# Altium PCB PCB_Arduino_Mega_2560_new.PcbDoc
Units mm, origin at the board's own origin, x right, y up, seen from the top; angles counter-clockwise.
Board outline 101.7 x 53.44 mm, 2 copper layers (Top Layer, Bottom Layer); 68 components, 110 nets, 365 pads, 90 vias.
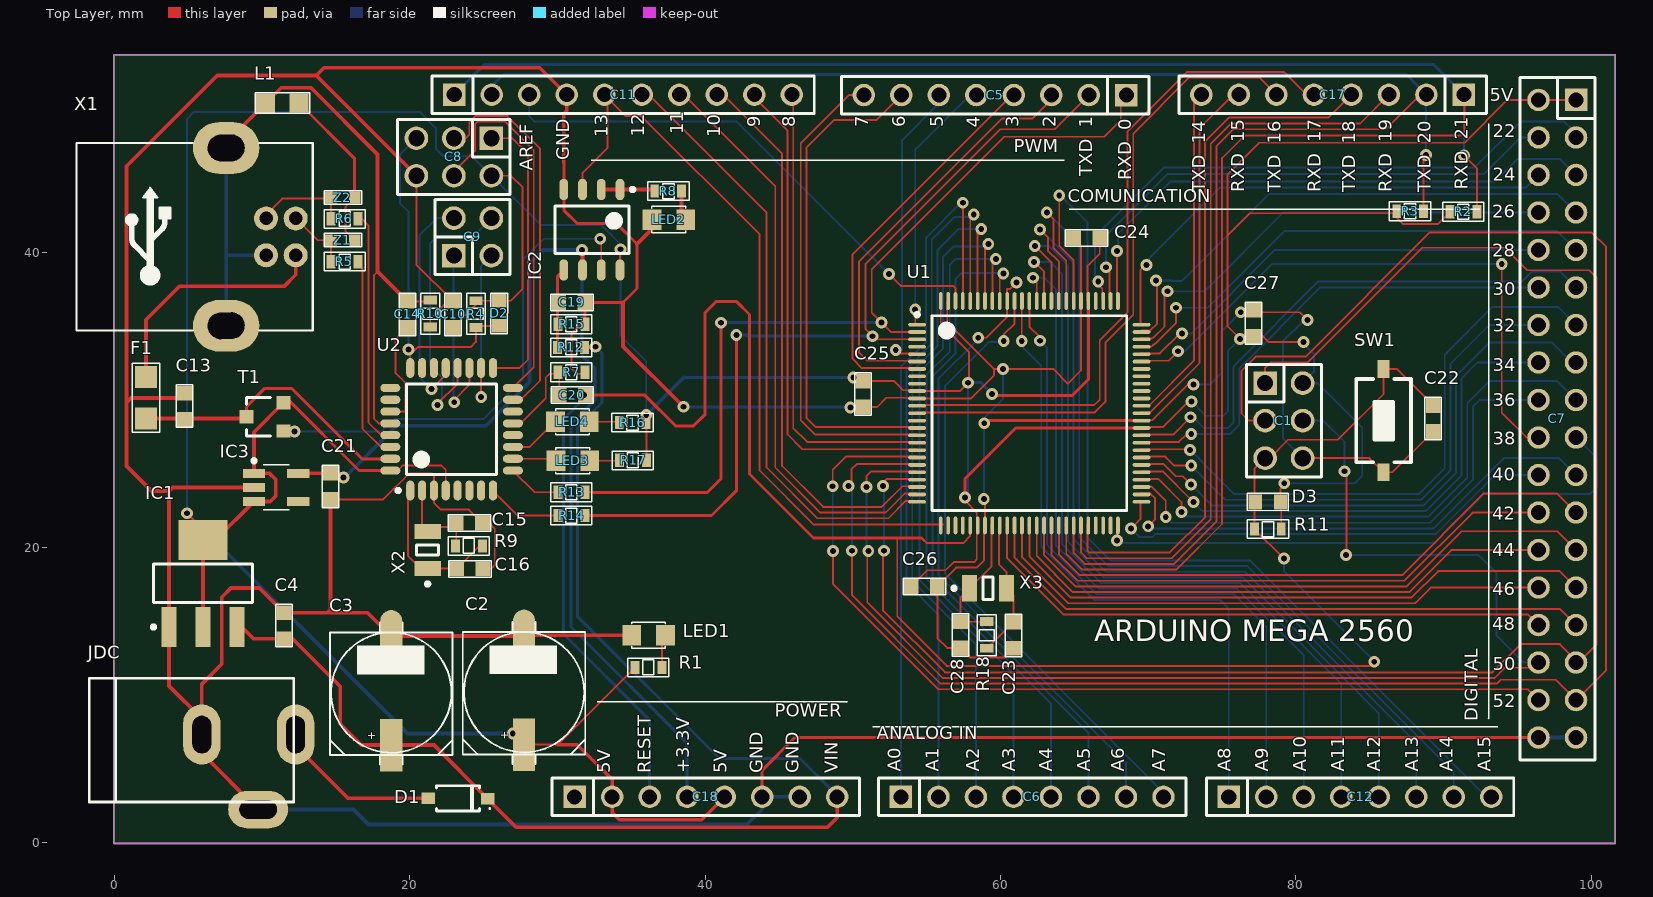
[diagram p0: Top Layer view]
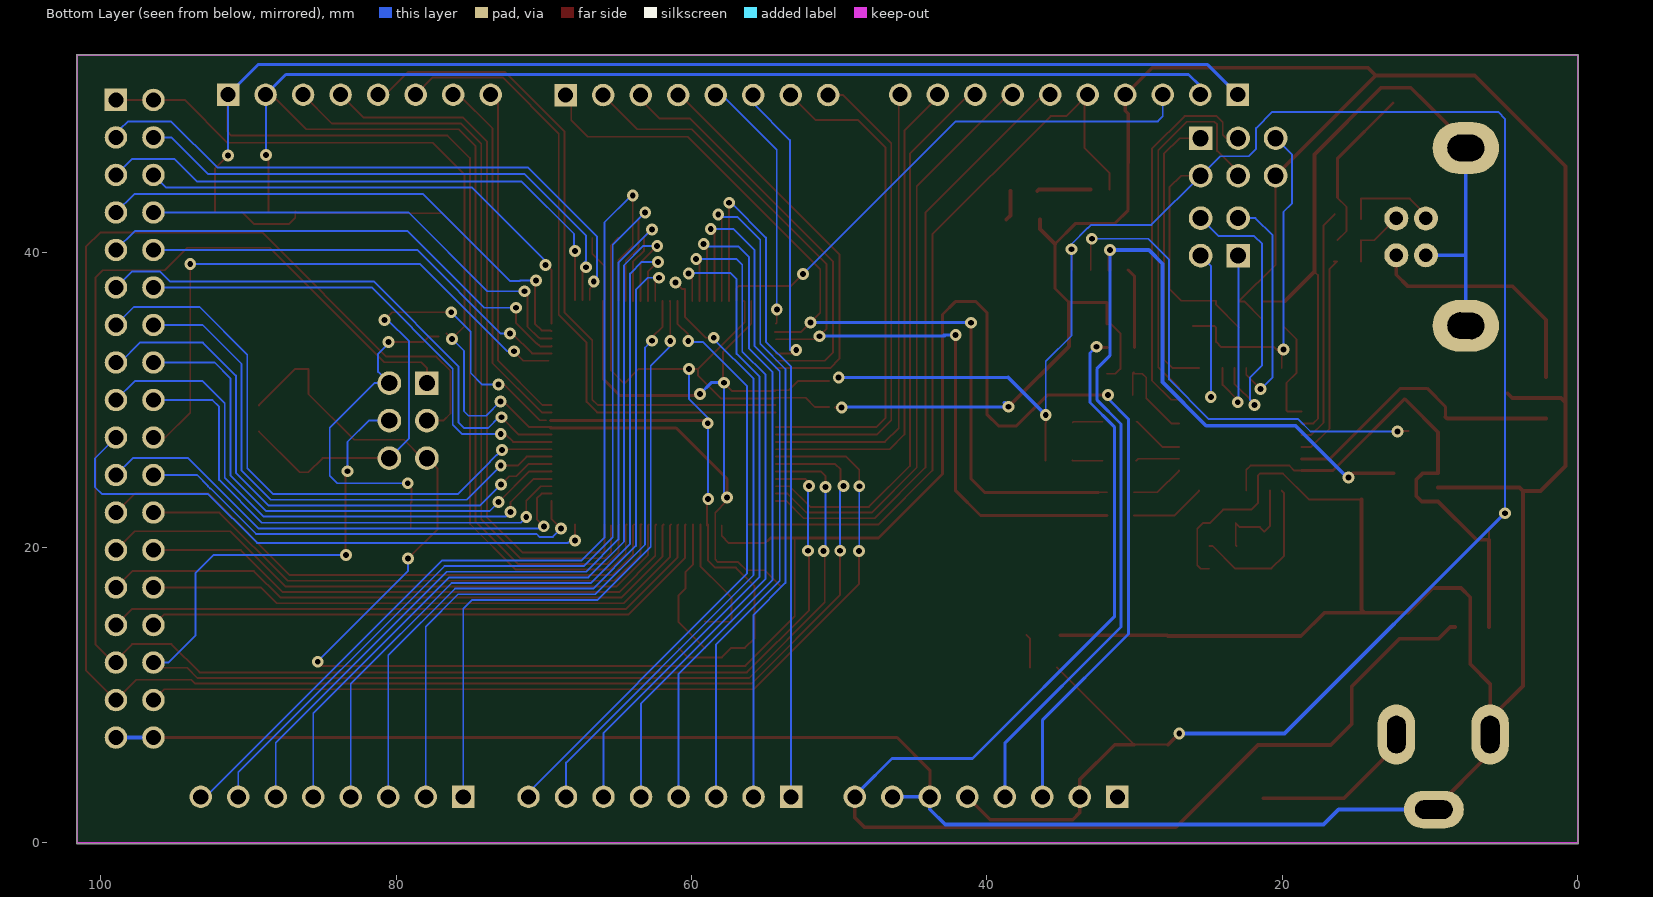
[diagram p1: Bottom Layer view, seen from below]
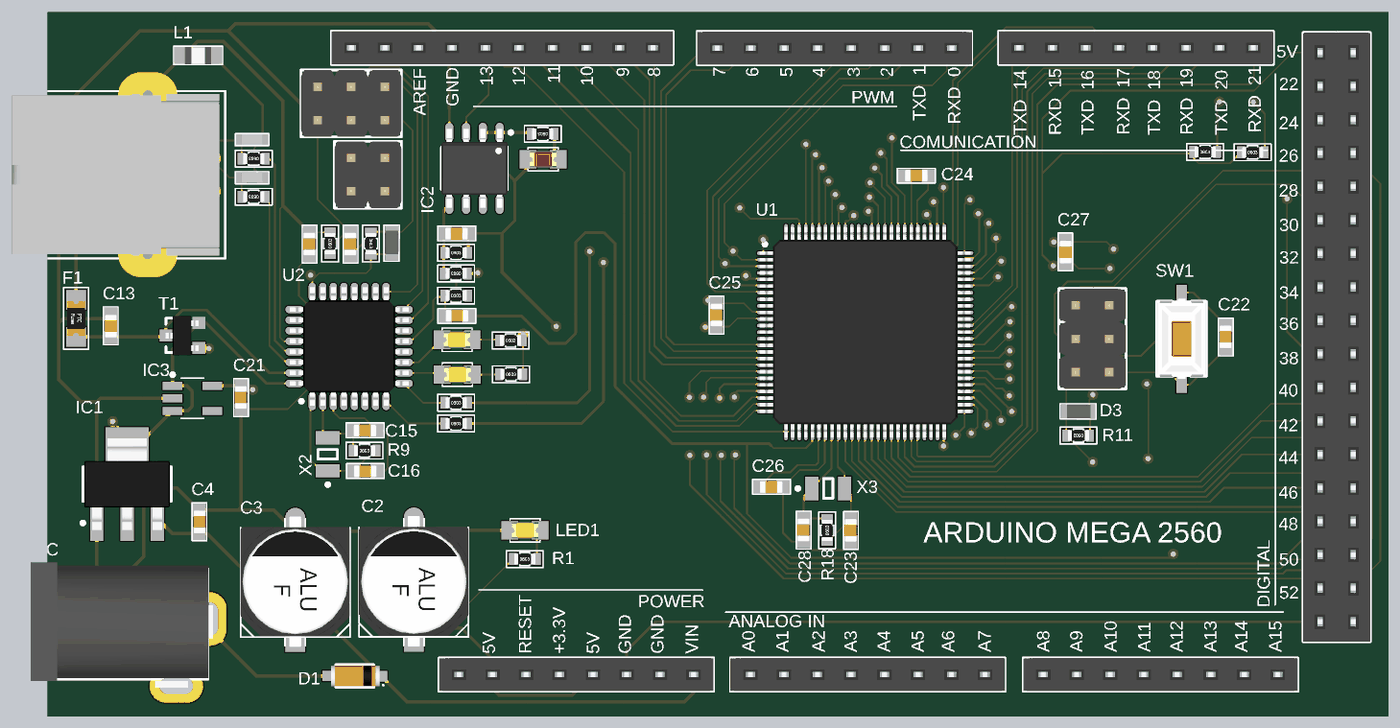
[diagram p2: 3D render of the assembled board from above, using the file's embedded part models]

## Layer stack, top to bottom
Top Solder: solder mask 0.0102, Solder Resist, Dk 3.5
Top Layer: signal copper 0.0356
Dielectric 1: dielectric 0.32, FR-4, Dk 4.8
Bottom Layer: signal copper 0.0356
Bottom Solder: solder mask 0.0102, Solder Resist, Dk 3.5

## Board outline
0,-0.05 cw(c0,0) -0.05,0 -0.05,53.34 cw(c0,53.34) 0,53.39 101.6,53.39 cw(c101.6,53.34) 101.65,53.34 101.65,0 cw(c101.6,0) 101.6,-0.05

## Design rules (kind name [scope] priority, off if disabled: settings)
Clearance [All] p1: gap=0.254 ignorepadtopadclearanceinfootprint=FALSE except(0: Arc-Hole Track-Hole SMDPad-Hole THPad-Hole Via-Hole Fill-Hole Poly-Hole Region-Hole Text-Hole)
PolygonConnect [All] p1: connectstyle=Relief reliefconductorwidth=0.254 reliefentries=4 polygonreliefangle="90 Angle" airgapwidth=0.254
RoomDefinition Sheet_Arduino_Mega_2560 [InComponentClass('Sheet_Arduino_Mega_2560')] p1: confinementstyle=ConfineIn formatcopy=TRUE lockcomponents=FALSE outline 152.146,-124.333 569.341,-124.333 569.341,-75.057 152.146,-75.057
RoutingVias [All] p1: holewidth=0.4 width=0.8 viastyle="Through Hole" minholewidth=0.4 minwidth=0.8 maxholewidth=0.4 maxwidth=0.8
SolderMaskExpansion [All] p1: expansion=0.102 istentingtop=FALSE
Width [All] p1: maxlimit=0.254 minlimit=0.127 preferedwidth=0.203
30 further rules are at their usual default settings.

## Components (designator, comment, footprint, x,y, rotation, side; value= is the part's Value field where it differs from the comment)
C1 "JP3x2" JP3-D2T 79.197,28.6 r270 top
C2 "47uF/16V" CAP-ALU-SMD-F 27.737,10.211 r90 top
C3 "47uF/16V" CAP-ALU-SMD-F 18.745,10.185 r90 top
C4 "100n" "cap 0603" 11.481,15.596 r270 top
C5 "JP8" JP8-C1T 68.529,50.648 r180 top locked
C6 "JP8" JP8-C1T 53.264,3.124 r0 top locked
C7 "JP18x2" JP18-C2T 97.714,28.727 r270 top locked
C8 "JP3x2" JP3-D2T 22.987,46.457 r180 top
C9 "JP2x2" JP2-D2T 24.257,41.046 r0 top
C10 "100n" "cap 0603" 22.934,34.908 r90 top
C11 "JP10" JP10-C1T 23.012,50.673 r0 top locked
C12 "JP8" JP8-C1T 75.463,3.124 r0 top locked
C13 "100n" "cap 0603" 4.75,30.455 r270 top
C14 "1u" "cap 0603" 19.837,34.908 r90 top
C15 "22p" "cap 0603" 24.917,21.664 r180 top
C16 "22p" "cap 0603" 24.943,18.567 r180 top
C17 "JP8" JP8-C1T 91.389,50.673 r180 top locked
C18 "JP8" JP8-C1T 31.166,3.124 r0 top locked
C19 "100n" "cap 0603" 31.862,36.601 r180 top
C20 "100n" "cap 0603" 30.124,30.328 r0 top
C21 "1u" "cap 0603" 14.63,23.266 r90 top
C22 "22p" "cap 0603" 89.306,27.864 r90 top
C23 "22p" "cap 0603" 60.884,13.183 r90 top
C24 "100n" "cap 0603" 64.956,40.97 r0 top
C25 "100n" "cap 0603" 50.698,29.523 r90 top
C26 "100n" "cap 0603" 55.728,17.374 r180 top
C27 "100n" "cap 0603" 77.14,36.068 r270 top
C28 "22p" "cap 0603" 57.302,13.208 r90 top
D1 "1N4148" SOD80_lib 23.266,3.023 r180 top
D2 "CD0603-S01575" CD0603-S01575 26.055,35.019 r90 top
D3 "CD0603-S01575" CD0603-S01575 77.267,23.089 r0 top
F1 "Fuse smd" Fuse_smd 2.108,30.251 r270 top
IC1 "NCP1117ST50T3G" SOT223-4M_apes 5.994,17.577 r90 top
IC2 "LM393" LM393 32.334,41.529 r270 top value=LM358
IC3 "LP2985-33DBVR" SOT23-5 10.947,24.079 r0 top
JDC "Jac DC" DC0 9.093,4.801 r0 top locked
L1 "BLM21" BLM21 11.43,50.165 r180 top
LED1 "LED smd" LED-0805-Yellow 37.313,14.072 r180 top
LED2 "LED smd" LED-0805-Red 38.684,42.215 r180 top
LED3 "LED smd" LED-0805-Yellow 32.182,25.883 r180 top
LED4 "LED smd" LED-0805-Yellow 32.156,28.524 r180 top
R1 "1K" RES-SMD-0603 36.144,11.887 r0 top
R2 "10K" RES-SMD-0603 91.338,42.748 r0 top
R3 "10K" RES-SMD-0603 87.732,42.774 r0 top
R4 "10K" RES-SMD-0603 24.482,35.832 r270 top
R5 "22R" RES-SMD-0603 15.596,39.37 r180 top
R6 "22R" RES-SMD-0603 15.596,42.263 r180 top
R7 "1K" RES-SMD-0603 30.937,31.876 r0 top
R8 "1K" RES-SMD-0603 37.516,44.145 r180 top
R9 "1M" RES-SMD-0603 23.993,20.115 r0 top
R10 "0R" RES-SMD-0603 21.385,35.832 r90 top
R11 "10K" RES-SMD-0603 78.13,21.26 r180 top
R12 "10K" RES-SMD-0603 30.937,33.553 r180 top
R13 "1K" RES-SMD-0603 30.937,23.749 r0 top
R14 "1K" RES-SMD-0603 30.937,22.174 r0 top
R15 "10K" RES-SMD-0603 30.937,35.128 r0 top
R16 "1K" RES-SMD-0603 35.077,28.473 r0 top
R17 "1K" RES-SMD-0603 35.103,25.908 r0 top
R18 "1M" RES-SMD-0603 59.08,14.072 r90 top
SW1 "SW" SW-SMD_apes 85.954,28.6 r270 top value="SW chip 2 pin"
T1 "FDN340P" SOT23-231 10.185,28.854 r90 top
U1 "ATmega2560-AU" TQFP100L 61.957,29.102 r0 top locked
U2 "ATmega16U2-AU" TQFP32 22.835,28.016 r90 top
X1 "USB-B_TH" USB-C2 6.833,41.3 r90 top locked
X2 "16MHz" XT2-32.768KHz-2_V 21.209,19.837 r90 top value=4Mhz
X3 "16MHz" XT2-32.768KHz-2_V 59.157,17.247 r0 top value=4Mhz
Z1 "CG0603MLC- 05E" "CG0603MLC- 05E" 15.469,40.816 r180 top
Z2 "CG0603MLC- 05E" "CG0603MLC- 05E" 15.469,43.709 r180 top

## Footprints (in the part's own frame and the unit in brackets; to place one, negate y for a bottom-side part, rotate by r counter-clockwise, add the part's x,y. Pads: shape width x height; smd on the part's side, far side on the other; paste and mask are expansions set on the pad)
BLM21 [mm] "BLM21"
  rect 1.3x1.3 smd: 1(-1.067,0.051) 2(1.194,0.076)
  silkscreen extent -1.8,-0.64 1.91,0.76, body extent -0.95,-0.58 1.05,0.73, height 0.73
"cap 0603" [mm] "cap 0603"
  rect 1x1 smd: 1(0,0) 2(1.77,0)
  silkscreen extent -0.56,-0.56 2.31,0.56, body extent 0,-0.46 1.77,0.49, height 0.88
CAP-ALU-SMD-F [mil]
  rect 140x59.06 smd: 1(-140,0)
  oval 140x59.06 smd: 2(150,0)
  silkscreen extent -192,-163 187,163, body extent -195,-163 195,163, height 402
CD0603-S01575 [mm] "diode CD0603-S01575"
  rect 0.9x1 smd: 1(0,0) 2(1.7,0)
  rect 0.5x0.8 smd: 1(0,0)
  silkscreen extent -0.53,-0.58 2.21,0.58, body extent -0.01,-0.5 1.79,0.5, height 0.85
"CG0603MLC- 05E" [mm] "CG0603MLC- 05E"
  rect 0.8x0.8 smd: 1(-0.8,0) 2(0.8,0)
  silkscreen extent -1.27,-0.46 1.27,0.46, body extent -0.8,-0.4 0.8,0.4, height 0.43
DC0 [mil] "Jac DC input"
  oval 100x160 hole 50 slot 100 at 90 deg: 1(125,100) 2(-125,100)
  oval 160x100 hole 50 slot 100 at 0 deg: 3(25,-100)
  silkscreen extent -425,-80 120,250, body extent -410,-105 134,269, height 434
Fuse_smd [mm] "Fuse_smd"
  rect 1.5x1.5 smd: 1(-1.298,0.025) 2(1.502,0.025)
  silkscreen extent -2.24,-0.92 2.45,0.97, body extent -1.19,-0.68 1.41,0.74, height 0.65
JP2-D2T [mm] "4 pins, dual pin, straight, gold plating"
  rect 1.6x1.6 hole 1.1: 1(-1.27,-1.27)
  round 1.6 hole 1.1: 2(1.27,-1.27) 3(1.27,1.27) 4(-1.27,1.27)
  silkscreen extent -2.54,-2.54 2.54,2.54, body extent -2.54,-2.54 2.54,2.54, height 8.55
JP3-D2T [mm] "6 pins, dual pin, straight, gold plating"
  rect 1.6x1.6 hole 1.1: 1(-2.54,-1.27)
  round 1.6 hole 1.1: 2(0,-1.27) 3(2.54,-1.27) 4(2.54,1.27) 5(0,1.27) 6(-2.54,1.27)
  silkscreen extent -3.81,-2.54 3.81,2.54, body extent -3.81,-2.54 3.81,2.54, height 8.55
JP8-C1T [mm] "8 row, straight, gold plating"
  rect 1.52x1.52 hole 1.02: 1(0,0)
  round 1.52 hole 1.02: 2(2.54,0) 3(5.08,0) 4(7.62,0) 5(10.16,0) 6(12.7,0) 7(15.24,0) 8(17.78,0)
  silkscreen extent -1.52,-1.27 19.3,1.27, body extent -1.52,-1.25 19.3,1.25, height 8.51
JP10-C1T [mm] "10 row, straight, gold plating"
  rect 1.52x1.52 hole 1.02: 1(0,0)
  round 1.52 hole 1.02: 2(2.54,0) 3(5.08,0) 4(7.62,0) 5(10.16,0) 6(12.7,0) 7(15.24,0) 8(17.78,0) 9(20.32,0) 10(22.86,0)
  silkscreen extent -1.52,-1.27 24.38,1.27, body extent -1.52,-1.25 24.38,1.25, height 8.51
JP18-C2T [mm] "36 pins, dual row, straight, gold plating"
  rect 1.52x1.52 hole 1.02: 1(-21.59,1.27)
  round 1.52 hole 1.02: 2(-19.05,1.27) 3(-16.51,1.27) 4(-13.97,1.27) 5(-11.43,1.27) 6(-8.89,1.27) 7(-6.35,1.27) 8(-3.81,1.27) 9(-1.27,1.27) 10(1.27,1.27) 11(3.81,1.27) 12(6.35,1.27) 13(8.89,1.27) 14(11.43,1.27) 15(13.97,1.27) 16(16.51,1.27) 17(19.05,1.27) 18(21.59,1.27) 19(21.59,-1.27) 20(19.05,-1.27) 21(16.51,-1.27) 22(13.97,-1.27) 23(11.43,-1.27) 24(8.89,-1.27) 25(6.35,-1.27) 26(3.81,-1.27) 27(1.27,-1.27) 28(-1.27,-1.27) 29(-3.81,-1.27) 30(-6.35,-1.27) 31(-8.89,-1.27) 32(-11.43,-1.27) 33(-13.97,-1.27) 34(-16.51,-1.27) 35(-19.05,-1.27) 36(-21.59,-1.27)
  silkscreen extent -23.11,-2.54 23.11,2.54, body extent -23.11,-2.54 23.11,2.54, height 8.51
LED-0805-Red [mil]
  rect 50x55 smd: 1(0,0) 2(90,0)
  silkscreen extent 0,-35 90,35, body extent 5,-25 85,25, height 43
LED-0805-Yellow [mil]
  rect 50x55 smd: 1(0,0) 2(90,0)
  silkscreen extent 0,-35 90,35, body extent 5,-25 85,25, height 43
LM393 [mm] "SOIC, 8-Leads, Body 4.91x3.90mm, Pitch 1.27mm, IPC Medium Density"
  oval 1.45x0.6 smd: 1(-2.725,1.905) 2(-2.725,0.635) 3(-2.725,-0.635) 4(-2.725,-1.905) 5(2.725,-1.905) 6(2.725,-0.635) 7(2.725,0.635) 8(2.725,1.905)
  silkscreen extent -2.85,-2.5 1.6,2.88, body extent -3,-2.5 3,2.5, height 1.75
RES-SMD-0603 [mm]
  rect 0.6x0.9 smd: 1(-0.889,0) 2(0.927,0)
  silkscreen extent -1.4,-0.64 1.4,0.64, body extent -0.8,-0.4 0.8,0.4, height 0.43
SOD80_lib [mm] "SOD80_lib"
  rect 0.9x0.8 smd: A(2.007,0) K(-2.007,0.025)
  silkscreen extent -2.2,-0.85 1.45,0.85, body extent -1.88,-0.8 1.82,0.8, height 1.61
SOT23-5 [mm] "SOT23, 5-Leads, Body 3.0x3.0mm (max), Pitch 0.95mm, IPC Medium Density"
  rect 1.5x0.6 smd: 1(-1.5,0.95) 2(-1.5,0) 3(-1.5,-0.95) 4(1.5,-0.95) 5(1.5,0.95)
  silkscreen extent -1.62,-1.52 0.87,1.92, body extent -1.75,-1.52 1.75,1.53, height 1.45
SOT23-231 [mm]
  rect 0.9x0.95 smd mask+0: 1(0.95,-1.25)
  rect 0.9x0.95 smd: 2(-0.95,-1.25) 3(0,1.25)
  silkscreen extent -1.3,-0.38 1.3,1.25, body extent -1.52,-1.23 1.48,1.27, height 1.06
SOT223-4M_apes [mm] "SOT223, 4-Leads, Body 6.5x3.5mm, Pitch 2.3mm, Lead Span 7mm, IPC Low Density"
  rect 2.7x1 smd: 1(-2.95,2.3) 2(-2.95,0) 3(-2.95,-2.3)
  rect 2.7x3.3 smd: 4(2.95,0)
  silkscreen extent -3.07,-3.35 1.3,3.47, body extent -3.48,-3.25 3.48,3.25, height 1.66
SW-SMD_apes [mm] "Switch SMD type"
  rect 1.2x0.8 smd: 1(-3.5,0) 2(3.5,0)
  silkscreen extent -2.82,-1.85 2.82,1.85, body extent -3.05,-1.85 3.05,1.85, height 2.5
TQFP32 [mm] "Thin QFP, 32-Leads, Body 9x9mm, Pitch 0.8mm, IPC Low Density"
  oval 1.35x0.55 smd: 1(-4.15,2.8) 2(-4.15,2) 3(-4.15,1.2) 4(-4.15,0.4) 5(-4.15,-0.4) 6(-4.15,-1.2) 7(-4.15,-2) 8(-4.15,-2.8) 17(4.15,-2.8) 18(4.15,-2) 19(4.15,-1.2) 20(4.15,-0.4) 21(4.15,0.4) 22(4.15,1.2) 23(4.15,2) 24(4.15,2.8)
  oval 0.55x1.35 smd: 9(-2.8,-4.15) 10(-2,-4.15) 11(-1.2,-4.15) 12(-0.4,-4.15) 13(0.4,-4.15) 14(1.2,-4.15) 15(2,-4.15) 16(2.8,-4.15) 25(2.8,4.15) 26(2,4.15) 27(1.2,4.15) 28(0.4,4.15) 29(-0.4,4.15) 30(-1.2,4.15) 31(-2,4.15) 32(-2.8,4.15)
  silkscreen extent -4.27,-3.05 3.05,3.75, body extent -4.5,-4.5 4.5,4.5, height 1.4
TQFP100L [mm] "TQFP, 100-Leads, Body 14.00x14.00mm, Pitch 0.50mm, IPC High Density"
  oval 1.2x0.25 smd: 1(-7.6,6) 2(-7.6,5.5) 3(-7.6,5) 4(-7.6,4.5) 5(-7.6,4) 6(-7.6,3.5) 7(-7.6,3) 8(-7.6,2.5) 9(-7.6,2) 10(-7.6,1.5) 11(-7.6,1) 12(-7.6,0.5) 13(-7.6,0) 14(-7.6,-0.5) 15(-7.6,-1) 16(-7.6,-1.5) 17(-7.6,-2) 18(-7.6,-2.5) 19(-7.6,-3) 20(-7.6,-3.5) 21(-7.6,-4) 22(-7.6,-4.5) 23(-7.6,-5) 24(-7.6,-5.5) 25(-7.6,-6) 51(7.6,-6) 52(7.6,-5.5) 53(7.6,-5) 54(7.6,-4.5) 55(7.6,-4) 56(7.6,-3.5) 57(7.6,-3) 58(7.6,-2.5) 59(7.6,-2) 60(7.6,-1.5) 61(7.6,-1) 62(7.6,-0.5) 63(7.6,0) 64(7.6,0.5) 65(7.6,1) 66(7.6,1.5) 67(7.6,2) 68(7.6,2.5) 69(7.6,3) 70(7.6,3.5) 71(7.6,4) 72(7.6,4.5) 73(7.6,5) 74(7.6,5.5) 75(7.6,6)
  oval 0.25x1.2 smd: 26(-6,-7.6) 27(-5.5,-7.6) 28(-5,-7.6) 29(-4.5,-7.6) 30(-4,-7.6) 31(-3.5,-7.6) 32(-3,-7.6) 33(-2.5,-7.6) 34(-2,-7.6) 35(-1.5,-7.6) 36(-1,-7.6) 37(-0.5,-7.6) 38(0,-7.6) 39(0.5,-7.6) 40(1,-7.6) 41(1.5,-7.6) 42(2,-7.6) 43(2.5,-7.6) 44(3,-7.6) 45(3.5,-7.6) 46(4,-7.6) 47(4.5,-7.6) 48(5,-7.6) 49(5.5,-7.6) 50(6,-7.6) 76(6,7.6) 77(5.5,7.6) 78(5,7.6) 79(4.5,7.6) 80(4,7.6) 81(3.5,7.6) 82(3,7.6) 83(2.5,7.6) 84(2,7.6) 85(1.5,7.6) 86(1,7.6) 87(0.5,7.6) 88(0,7.6) 89(-0.5,7.6) 90(-1,7.6) 91(-1.5,7.6) 92(-2,7.6) 93(-2.5,7.6) 94(-3,7.6) 95(-3.5,7.6) 96(-4,7.6) 97(-4.5,7.6) 98(-5,7.6) 99(-5.5,7.6) 100(-6,7.6)
  silkscreen extent -7.72,-6.6 6.6,6.8, body extent -8,-8 8,8, height 1.2
USB-C2 [mil]
  round 64 hole 36 mask+1: 1(-59.21,-214.16) 2(39.21,-214.16) 3(39.21,-135.42) 4(-59.21,-135.42)
  oval 137.8x177.17 hole 70.87 slot 98.43 at 91 deg mask+0: 4(-247.01,-28.72) 4(227.01,-28.72)
  silkscreen extent -260,-260 240,370, body extent -293,-242 273,376, height 453
XT2-32.768KHz-2_V [mm] "Hand Drawn, 2-Leads, Body 3.2x1.5mm, Pitch 2.5mm"
  rect 1x1.8 smd: 1(-1.25,0) 2(1.25,0)
  silkscreen extent -2.43,-0.75 0.35,0.75, body extent -1.6,-0.75 1.6,0.75, height 0.9

## Part data
C1 C8: "WR-PHD 2.54 mm Dual Socket Header", Manufacturer="W¨¹rth Elektronik eiSos GmbH", partNo=61300621821, ComponentLink1 Description=Manufacturer, ComponentLink1URL=http://www.we-online.com, ComponentLink2 Description=Datasheet, ComponentLink2URL=http://katalog.we-online.de/em/datasheet/6130xx21821.pdf, Created by="Karrer Zheng", Created Date="29 March 2013", NoPins=06
C2 C3: library part "Cap 47uF/16V", "Cap 47uF/16V"
C4 C10 C13 C19 C20 C24 C25 C26 C27: library part Cap, "100nF±5%/5V", Supplier Part Number 1=1276-CL21B104KBFXPJETR-ND, Supplier 1=Digikey
C5 C6 C12 C17 C18: "WR-PHD 2.54 mm Angled Socket Header", Manufacturer="W¨¹rth Elektronik eiSos GmbH", partNo=613008143121, ComponentLink1 Description=Manufacturer, ComponentLink1URL=http://www.we-online.com, ComponentLink2 Description=Datasheet, ComponentLink2URL=http://katalog.we-online.de/em/datasheet/6130xx143121.pdf, Created by="Karrer Zheng", Created Date="29 March 2013", NoPins=08
C7: "WR-PHD 2.54 mm Dual Socket Header", Manufacturer="W¨¹rth Elektronik eiSos GmbH", partNo=61303621821, ComponentLink1 Description=Manufacturer, ComponentLink1URL=http://www.we-online.com, ComponentLink2 Description=Datasheet, ComponentLink2URL=http://katalog.we-online.de/em/datasheet/6130xx21821.pdf, Created by="Karrer Zheng", Created Date="29 March 2013", NoPins=36
C9: "WR-PHD 2.54 mm Dual Socket Header", Manufacturer="W¨¹rth Elektronik eiSos GmbH", partNo=61300421821, ComponentLink1 Description=Manufacturer, ComponentLink1URL=http://www.we-online.com, ComponentLink2 Description=Datasheet, ComponentLink2URL=http://katalog.we-online.de/em/datasheet/6130xx21821.pdf, Created by="Karrer Zheng", Created Date="29 March 2013", NoPins=04
C11: "WR-PHD 2.54 mm Angled Socket Header", Manufacturer="W¨¹rth Elektronik eiSos GmbH", partNo=613010143121, ComponentLink1 Description=Manufacturer, ComponentLink1URL=http://www.we-online.com, ComponentLink2 Description=Datasheet, ComponentLink2URL=http://katalog.we-online.de/em/datasheet/6130xx143121.pdf, Created by="Karrer Zheng", Created Date="29 March 2013", NoPins=10
C14 C15 C16 C21 C22 C23 C28: library part Cap, "0.47uF/1.6kV"
D1: library part "Diode 1N4148"
D2 D3: "diode CD0603-S01575"
F1: library part Fuse_smd
IC1: "NCP1117"
IC2: "Low-Power Dual Operational Amplifier"
IC3: library part LP2985
JDC: library part DCIN, "Jac DC input"
L1: "BLM21 EMI"
R1 R5 R6 R7 R8 R9 R10 R13 R14 R16 R17 R18: library part "RES SMD", "res smd"
R2 R3 R4 R11 R12 R15: library part "RES SMD", "10K±1%/0.25W", Supplier Part Number 1=MH006333, Supplier 1="Minh Hà"
SW1: library part SW2, "Switch button 2 pin"
T1: library part FDN340D
U1: "8-bit AVR Microcontroller, 4.5-5.5V, 256KB Flash, 4KB EEPROM, 8KB SRAM, 86 GPIO pins, 100-pin TQFP, Industrial Grade (-40°C to 85°C), Pb-Free", Supplier Part Number 1=ATMEGA2560-16AUR-ND, Supplier 1=Digi-Key
U2: "IC MCU 8BIT 16KB FLASH 32TQFP", Manufacturer=Atmel, Manufacturer Part Number=ATMEGA16U2-AU, Operating Temperature="-40°C ~ 85°C", Package / Case=32-TQFP, Supplier Device Package="32-TQFP (7x7)", Supplier Part Number 1=ATMEGA16U2-AU-ND, Voltage - Supply (Vcc/Vdd)="2.7 V ~ 5.5 V", .Checked PCB=RF, .Checked SCH=RF, .Creator=MM, Category="Integrated Circuits (ICs)", ComponentLink1Description=http://www.atmel.com/Images/7799s.pdf, ComponentLink1URL=http://www.atmel.com/Images/7799s.pdf, Connectivity="SPI, UART/USART, USB", Core Processor=AVR, Core Size=8-Bit, Data Converters=-, EEPROM Size="512 x 8", Number of I/O=22, Oscillator Type=Internal, Packaging=Tray, Peripherals="Brown-out Detect/Reset, POR, PWM, WDT", Pricing 1="1=4.35, 10=3.881, 25=3.4932, 100=3.1826, 250=2.87212, 500=2.57716, 1000=2.1735 (USD)", Program Memory Size="16KB (8K x 16)", Program Memory Type=FLASH, RAM Size="512 x 8", RoHS="RoHS Compliant", Speed=16MHz, Stock 1=8549, Supplier 1=Digi-Key
X1: library part USB-B
X2 X3: library part XT2_1, "Crystal, 32.768 KHz, -40 to 85 degC, 3.2 x 1.5 x 0.9 mm SMD"
Z1 Z2: "EMI CG0603MLC- 05E"

## Via types
v1: diameter 0.8, hole 0.4, Top Layer to Bottom Layer, tented both sides, 90 vias

## Nets (pads, with @x,y where several pads share a name; then routed paths per layer and width w, separated by ;. In a path a pad name is that pad's centre, name@x,y a point inside that pad or via, vN(x,y) a via of type N, cw(c..) or ccw(c..) an arc to the next point about the centre after c; other vN are vias at no path point)
5V: C1.6 C2.1 C7.1 C7.36 C8.6 C10.1 C18.2 C18.5 C24.2 C25.2 C26.2 C27.2 D2.2 D3.2 IC1.2 IC1.4 IC2.8 IC3.1 IC3.3 R1.1 R2.1 R3.1 R4.1 R11.1 R16.2 R17.2 T1.1 U1.10 U1.31 U1.61 U1.80 U1.100 U2.4 U2.32 | length 356.4
  Top Layer w0.127: v1(4.902,22.327) 5.994,21.234 IC1.4 ; U2.32 19.171,25.216 19.507,25.552 22.149,25.552 22.435,25.267 U2.4 ; C10.1 24.482,36.456 R4.1 26.053,36.721 D2.2 26.839,36.719 27.635,37.516 27.635,44.399 26.848,45.187 C8.6 ; C2.1 30.023,6.655 R1.1 ; IC2.8 34.239,40.183 v1(34.265,40.208) ; v1(36.017,28.981) 36.004,28.968 R16.2 36.03,28.448 R17.2 ; C25.2 52.781,31.293 53.42,30.654 U1.10@54.498,30.654 ; C26.2 55.05,18.466 56.281,18.466 56.84,19.025 58.217,19.025 58.4,19.208 58.4,21.559 58.4,22.372 57.607,23.165 v1(57.607,23.393) ; U1.10 57.246,30.602 v1(57.81,31.166) 57.861,31.217 57.861,33.264 56.019,35.107 56.019,35.116 55.957,35.178 U1.100 ; U1.80 65.907,36.752 65.907,39.084 66.726,39.903 C24.2 ; U1.61@69.5,28.159 70.984,28.159 72.949,30.124 v1(72.949,29.896) ; 76.606,34.519 v1(76.225,34.138) 75.387,34.976 75.387,41.148 ; C27.2 77.732,34.298 77.74,34.29 77.765,34.315 78.146,33.934 v1(80.518,33.934) ; R11.1 79.019,23.036 D3.2 78.967,24.001 79.223,24.257 v1(79.223,24.359) ; R2.1 89.611,41.91 87.274,41.91 86.843,42.342 R3.1 86.715,42.647 76.886,42.647 75.387,41.148 ; C7.1 C7.36 94.336,50.317 91.44,47.422 77.521,47.422 75.387,45.288 75.387,41.148
  Top Layer w0.203: T1.1 11.705,30.074 16.562,25.216 U2.32 ; v1(57.607,23.393) 57.607,24.663 61.045,28.102 U1.61 ; v1(59.436,30.404) 59.538,30.302 64.872,30.302 65.957,31.388 U1.80
  Top Layer w0.254: IC1.2 IC1.4 6.845,20.527 IC3.3 10.556,23.129 10.922,23.495 10.922,24.613 10.505,25.029 IC3.1 9.447,27.816 T1.1 ; v1(26.975,7.417) C2.1 ; 30.023,6.655 31.344,6.655 33.706,4.293 C18.2 33.706,2.057 34.188,1.575 39.776,1.575 C18.5
  Bottom Layer w0.127: v1(4.902,22.327) 4.902,49.022 5.385,49.505 20.676,49.505 21.768,48.412 21.768,47.015 22.276,46.507 24.206,46.507 C8.6 28.854,41.859 32.944,41.859 33.166,41.637 33.19,41.637 34.265,40.562 v1(34.265,40.208) 34.265,34.366 36.017,32.614 v1(36.017,28.981) ; v1(57.607,23.393) 57.81,23.597 v1(57.81,31.166) ; v1(72.949,29.896) 73.914,28.931 75.108,28.931 75.413,29.235 75.413,33.325 v1(76.225,34.138) ; v1(79.223,24.359) 83.998,24.359 84.506,24.867 84.506,28.118 81.483,31.14 C1.6 81.229,31.902 81.229,33.122 80.416,33.934 v1(80.518,33.934)
  Bottom Layer w0.203: 38.557,31.521 v1(50.038,31.521) ; v1(57.81,31.166) 58.674,31.166 v1(59.436,30.404)
  Bottom Layer w0.254: v1(4.902,22.327) 4.928,22.327 19.837,7.417 v1(26.975,7.417) ; v1(36.017,28.981) 38.557,31.521
8PB4: C9.2 U2.18 | length 11.8
  Top Layer w0.127: v1(24.835,30.194) U2.18
  Bottom Layer w0.127: v1(24.835,30.194) 24.835,39.084 C9.2
8PB5: C9.1 U2.19 | length 12.7
  Top Layer w0.127: v1(23.012,29.845) 23.012,29.997 24.035,31.02 U2.19
  Bottom Layer w0.127: C9.1 22.962,39.751 22.962,29.896 v1(23.012,29.845)
8PB6: C9.3 U2.20 | length 19.3
  Top Layer w0.127: v1(21.869,29.667) 21.869,29.743 23.235,31.109 U2.20
  Bottom Layer w0.127: v1(21.869,29.667) 22.181,29.978 22.181,31.54 21.361,32.36 21.361,40.564 21.895,41.097 24.308,41.097 C9.3
8PB7: C9.4 U2.21 | length 15.4
  Top Layer w0.127: v1(21.463,30.734) 22.435,31.706 U2.21
  Bottom Layer w0.127: v1(21.463,30.734) 20.65,31.547 20.65,41.148 21.819,42.316 C9.4
+3V3: C18.4 C21.2 IC2.6 IC3.5 | length 73.1
  Top Layer w0.254: IC3.5 14.623,25.029 C21.2 15.223,25.036 v1(15.519,24.74) ; v1(31.674,40.157) 31.699,40.132 IC2.6
  Bottom Layer w0.203: v1(31.674,40.157) 31.674,32.995 32.556,32.112 32.556,30.015 30.912,28.37 30.912,14.63 38.786,6.756 C18.4
  Bottom Layer w0.254: v1(15.519,24.74) 15.589,24.74 19.107,28.258 25.152,28.258 28.105,31.21 28.105,39.23 29.032,40.157 v1(31.674,40.157)
ADC0: C6.1 U1.97 | length 48.7
  Top Layer w0.127: v1(57.455,43.358) 57.457,43.355 U1.97
  Bottom Layer w0.127: C6.1 53.264,32.254 54.966,33.956 54.966,40.996 57.328,43.358 v1(57.455,43.358)
ADC1: C6.2 U1.96 | length 49
  Top Layer w0.127: U1.96 57.957,42.336 v1(58.191,42.57)
  Bottom Layer w0.127: C6.2 55.804,15.452 53.645,17.611 53.645,32.096 55.347,33.798 55.347,40.838 56.901,42.393 58.014,42.393 v1(58.191,42.57) v1@58.064,42.697
ADC2: C6.3 U1.95 | length 48.5
  Top Layer w0.127: U1.95 58.457,41.617 58.662,41.617 v1(58.699,41.58)
  Bottom Layer w0.127: C6.3 58.344,13.451 54.026,17.769 54.026,31.938 55.728,33.64 55.728,40.132 57.175,41.58 v1(58.699,41.58) v1@58.522,41.758
ADC3: C6.4 U1.94 | length 47.4
  Top Layer w0.127: U1.94 58.957,40.492 59.03,40.564 v1(59.182,40.564)
  Bottom Layer w0.127: v1@59.182,40.665 v1(59.182,40.564) 59.004,40.386 56.82,40.386 56.109,39.675 56.109,33.482 54.518,31.892 54.518,17.815 60.884,11.45 C6.4
ADC4: C6.5 U1.93 | length 46.8
  Top Layer w0.127: U1.93 59.457,39.595 59.643,39.595 v1(59.69,39.548)
  Bottom Layer w0.127: v1@59.538,39.7 v1(59.69,39.548) 56.972,39.548 56.566,39.141 56.566,33.274 54.991,31.699 54.991,17.882 63.424,9.449 C6.5
ADC5: C6.6 U1.92 | length 45.5
  Top Layer w0.127: U1.92 59.957,38.367 60.147,38.557 v1(60.198,38.557)
  Bottom Layer w0.127: v1(60.198,38.557) 60.147,38.608 57.379,38.608 56.947,38.176 56.947,33.116 55.397,31.567 55.397,18.014 65.964,7.448 C6.6
ADC6: C6.7 U1.91 | length 42.8
  Top Layer w0.127: v1(58.496,34.214) 59.03,34.214 60.457,35.642 U1.91 60.457,37.521 60.652,37.521 v1(61.087,37.956)
  Bottom Layer w0.127: v1(58.496,34.214) 58.496,34.127 55.804,31.434 55.804,18.146 68.504,5.446 C6.7 ; v1(61.087,37.956) v1@61.087,38.024
ADC7: C6.8 U1.90 | length 42.2
  Top Layer w0.127: v1(60.223,33.985) 60.223,34.442 60.957,35.176 U1.90
  Bottom Layer w0.127: v1(60.223,33.985) 60.155,33.917 59.214,33.917 56.236,30.939 56.236,18.253 71.044,3.445 C6.8
ADC8: C12.1 U1.89 | length 44.4
  Top Layer w0.127: v1(61.443,33.985) 61.443,36.666 61.468,36.691 U1.89
  Bottom Layer w0.127: v1(61.443,33.985) 61.443,33.63 62.763,32.309 62.763,20.053 66.358,16.459 74.854,16.459 75.463,15.85 C12.1
ADC9: C12.2 U1.88 | length 46
  Top Layer w0.127: U1.88 61.957,34.969 62.687,34.239 v1(62.687,34.011)
  Bottom Layer w0.127: v1(62.687,34.011) 63.043,34.011 62.865,33.833 63.144,33.553 63.144,20.211 66.516,16.84 75.819,16.84 78.003,14.656 C12.2
ADC10: C12.3 U1.87 | length 50.5
  Top Layer w0.127: v1(62.205,38.278) 62.281,38.278 62.457,38.101 U1.87
  Bottom Layer w0.127: v1@62.128,38.354 v1(62.205,38.278) 62.967,38.278 63.777,37.468 63.777,20.118 66.673,17.221 76.022,17.221 80.543,12.7 C12.3
ADC11: C12.4 U1.86 | length 53.9
  Top Layer w0.127: v1(62.281,39.345) 62.957,38.668 U1.86
  Bottom Layer w0.127: v1(62.281,39.345) 63.373,39.345 64.16,38.557 64.16,20.273 66.831,17.602 76.26,17.602 83.083,10.779 C12.4
ADC12: C12.5 U1.85 | length 57.2
  Top Layer w0.127: v1(62.332,40.437) 63.457,39.311 U1.85
  Bottom Layer w0.127: v1(62.332,40.437) 63.266,40.437 64.577,39.126 64.577,20.395 66.989,17.983 76.418,17.983 85.623,8.778 C12.5
ADC13: C12.6 U1.84 | length 59.9
  Top Layer w0.127: v1(62.687,41.554) 63.221,41.021 63.221,40.121 63.957,39.384 U1.84
  Bottom Layer w0.127: v1(62.687,41.554) 64.958,39.284 64.958,20.553 67.147,18.364 76.576,18.364 88.163,6.776 C12.6
ADC14: C12.7 U1.83 | length 63.1
  Top Layer w0.127: v1(63.144,42.697) 63.602,42.24 63.602,40.279 64.457,39.423 U1.83
  Bottom Layer w0.127: v1(63.144,42.697) 65.339,40.503 65.339,20.711 67.305,18.745 76.733,18.745 90.703,4.775 C12.7
ADC15: C12.8 U1.82 | length 66.2
  Top Layer w0.127: v1(63.983,43.84) 63.983,40.437 64.957,39.462 U1.82
  Bottom Layer w0.127: v1(63.983,43.84) 64.084,43.84 65.907,42.018 65.907,20.682 67.462,19.126 76.911,19.126 92.913,3.124 C12.8
AREF: C11.3 U1.98 | length 36
  Top Layer w0.127: v1(52.451,38.532) 53.264,37.719 56.82,37.719 56.957,37.581 U1.98
  Bottom Layer w0.127: C11.3 28.092,49.2 28.423,48.87 42.113,48.87 v1(52.451,38.532)
D+: R6.2 X1.3 Z2.2 | length 6.5
  Top Layer w0.127: X1.3 10.272,42.556 11.354,43.637 14.668,43.637 R6.2@14.668,42.24
D-: R5.2 X1.2 Z1.2 | length 4.5
  Top Layer w0.127: X1.2 13.752,40.816 Z1.2 R5.2
DTR: C20.1 R7.1 U2.13 | length 6.9
  Top Layer w0.127: U2.13 27.502,28.416 29.21,30.124 29.21,31.521 29.464,31.775 R7.1@30.048,31.775 ; R7.1 30.124,31.799 C20.1
GND: C1.4 C2.2 C3.2 C4.1 C7.18 C7.19 C8.4 C10.2 C11.4 C13.1 C15.1 C16.1 C18.6 C18.7 C19.1 C21.1 C22.1 C23.1 C24.1 C25.1 C26.1 C27.1 C28.1 IC1.1 IC2.4 IC3.2 JDC.2 JDC.3 LED1.2 LED2.2 R7.2 R10.1 R15.2 SW1.2 U1.11 U1.32 U1.62 U1.81 U1.99 U2.3 | length 429.8
  Top Layer w0.127: C21.1 18.197,23.266 19.949,25.019 21.514,25.019 21.635,24.898 U2.3 21.635,23.044 22.098,22.581 24,22.581 C15.1 25.377,21.664 25.756,21.285 25.756,18.796 25.527,18.567 C16.1 ; C8.4 20.447,39.164 C10.2 22.581,36.678 21.385,35.482 R10.1 ; R15.2@31.862,35.131 31.575,35.131 30.963,34.519 30.963,32.106 31.293,31.776 R7.2@31.864,31.776 ; C25.1 51.646,29.523 52.277,30.154 U1.11@54.498,30.154 ; U1.11 58.021,30.102 59.559,31.64 59.559,32.106 ; U1.99 56.4,36.644 56.4,35.264 59.559,32.106 ; v1(58.877,23.292) 58.957,23.212 U1.32 ; U1.32@58.9,21.559 58.9,19.149 58.395,18.644 56.998,18.644 C26.1 55.728,13.868 56.388,13.208 C28.1 57.945,12.565 60.266,12.565 C23.1 ; C24.1 65.457,40.469 U1.81 65.457,32.006 64.562,31.111 63.568,32.106 v1(60.173,32.106) 59.559,32.106 ; U1.62@69.85,28.626 70.282,28.626 72.695,31.039 v1(73.074,31.039) ; v1(76.276,35.941) 80.264,35.941 v1(80.797,35.408) ; C1.4 84.994,26.06 SW1.2 86.543,25.1 C22.1
  Top Layer w0.203: 30.429,46.076 IC2.4 30.429,42.85 31.318,41.961 33.985,41.961 35.382,40.564 35.382,37.541 34.442,36.601 C19.1 R15.2@31.862,35.131 ; C18.6 43.866,4.928 46.076,7.137 C7.19 ; v1(49.835,29.489) C25.1@50.267,29.489 ; v1(58.903,28.423) 58.903,28.6 58.904,28.602 U1.62
  Top Layer w0.254: C13.1 4.42,30.124 1.118,30.124 0.813,29.82 ; IC3.2 3.937,24.079 3.694,23.837 ; JDC.3 5.918,6.071 JDC.2 JDC.2@5.918,8.407 ; C21.1 14.63,15.799 14.427,15.596 ; C8.4 13.665,51.968 ; 30.429,46.076 30.429,49.378 30.632,49.581 C11.4 28.804,52.502 14.199,52.502 13.665,51.968 ; 34.442,36.601 34.442,33.63 v1(38.532,29.54) ; LED1.2 27.788,14.072 C2.2 18.771,14.021 C3.2 17.145,15.596 14.427,15.596 ; 35.382,40.564 36.398,41.58 LED2.2 ; 0.813,29.82 0.813,25.527 2.503,23.837 3.694,23.837 ; 0.813,29.82 0.813,45.822 6.96,51.968 13.665,51.968 ; 3.694,23.837 IC1.1 3.694,10.631 JDC.2@5.918,8.407 ; JDC.2@5.918,8.407 5.918,10.77 7.264,12.116 7.264,16.637 7.899,17.272 9.804,17.272 C4.1 14.427,15.596
  Bottom Layer w0.127: v1(58.877,23.292) 58.877,28.753 60.173,30.048 v1(60.173,32.106) ; v1(73.074,31.039) 74.168,31.039 74.955,31.826 74.955,34.62 v1(76.276,35.941) ; C1.4 79.134,27.394 79.134,33.972 80.569,35.408 v1(80.797,35.408)
  Bottom Layer w0.203: v1(38.532,29.54) 49.784,29.54 v1(49.835,29.489)
  Bottom Layer w0.254: JDC.3 16.18,2.261 17.196,1.245 42.824,1.245 43.866,2.286 C18.6 C18.7 ; v1(38.532,29.54) v1@38.811,29.82 ; C7.19 C7.18
M8RXD: R13.1 U2.9 | length 3.7
  Top Layer w0.127: U2.9 28.452,23.749 R13.1
M8TXD: R14.1 U2.8 | length 5.1
  Top Layer w0.127: U2.8 27.327,22.174 R14.1
MISO2: C8.1 U2.17 | length 19.5
  Top Layer w0.127: C8.1 26.949,47.727 28.016,46.66 28.016,32.741 27.442,32.166 U2.17
MOSI2: C8.5 U2.16 | length 25.6
  Top Layer w0.127: C8.5 22.987,45.441 24.409,46.863 24.409,48.658 24.595,48.844 26.459,48.844 28.397,46.905 28.397,32.229 U2.16
NetC15_2: C15.2 R9.1 U2.2 X2.2 | length 6.7
  Top Layer w0.127: U2.2 20.835,21.462 X2.2 21.508,21.387 22.871,21.387 C15.2 23.147,20.159 R9.1
NetC16_2: C16.2 R9.2 U2.1 X2.1 | length 10.5
  Top Layer w0.127: U2.1 19.888,23.72 19.888,19.431 20.732,18.587 X2.1 23.153,18.587 C16.2 24.721,20.116 R9.2
NetC19_2: C19.2 IC2.5 R12.2 R15.1 | length 5.4
  Top Layer w0.203: R12.2 30.01,35.128 30.01,38.385 IC2.5
NetD1_A: D1.A JDC.1 | length 11.2
  Top Layer w0.254: JDC.1 12.268,6.579 15.824,3.023 D1.A
NetIC2_1: IC2.1 IC2.2 R8.2 | length 3.7
  Top Layer w0.254: IC2.2 IC2.1 36.48,44.254 R8.2
NetIC2_7: IC2.7 T1.2 | length 33.8
  Top Layer w0.127: T1.2 12.151,27.904 v1(12.192,27.864) ; v1(32.893,40.919) 32.969,40.843 IC2.7
  Bottom Layer w0.127: v1(12.192,27.864) 18.085,27.864 18.923,28.702 24.968,28.702 27.661,31.394 27.661,39.497 29.083,40.919 v1(32.893,40.919)
NetL1_1: L1.1 Z1.1 Z2.1 | length 11.4
  Top Layer w0.127: Z1.1 15.646,41.438 15.646,43.087 Z2.1
  Top Layer w0.203: L1.1 16.269,46.342 Z2.1
NetLED1_1: LED1.1 R1.2 | length 2.3
  Top Layer w0.127: R1.2 37.071,13.83 LED1.1
NetLED2_1: LED2.1 R8.1 | length 2
  Top Layer w0.254: R8.1 38.405,42.494 LED2.1
NetLED3_1: LED3.1 R17.1 | length 2
  Top Layer w0.127: LED3.1 34.188,25.883 R17.1
NetLED4_1: LED4.1 R16.1 | length 2.1
  Top Layer w0.127: LED4.1 34.138,28.524 R16.1
PA0: C7.2 U1.78 | length 41.5
  Top Layer w0.127: v1(66.624,38.024) 66.624,37.821 66.9,37.545 U1.78@66.9,36.759
  Bottom Layer w0.127: v1(66.624,38.024) 66.396,38.252 66.396,41.046 71.095,45.745 92.126,45.745 95.235,48.855 98.186,48.855 98.679,48.362 98.679,47.777 98.984,48.082 C7.2
PA1: C7.35 U1.77 | length 36.6
  Top Layer w0.127: v1(67.151,38.987) 67.337,38.987 67.4,38.925 U1.77@67.4,36.759
  Bottom Layer w0.127: v1(67.151,38.987) v1@67.159,38.987 ; v1@67.412,39.161 67.158,39.415 67.158,41.148 71.323,45.314 92.761,45.314 95.225,47.777 C7.35
PA2: C7.3 U1.76 | length 38.1
  Top Layer w0.127: v1(67.894,40.081) 67.9,40.076 U1.76@67.9,36.759
  Bottom Layer w0.127: v1(67.894,40.081) 67.869,40.107 67.96,40.197 67.96,41.239 71.526,44.806 93.497,44.806 95.007,46.315 97.906,46.315 C7.3
PA3: C7.34 U1.75 | length 33.4
  Top Layer w0.127: U1.75@69.5,35.159 69.5,38.817 69.825,39.141 v1(69.901,39.141)
  Bottom Layer w0.127: v1(69.901,39.141) 69.901,39.37 69.875,39.395 74.879,44.399 95.606,44.399 C7.34
PA4: C7.4 U1.74 | length 36.3
  Top Layer w0.127: U1.74@69.5,34.659 69.557,34.717 70.158,34.717 70.616,35.175 70.616,37.056 70.606,37.066 70.606,38.03 v1(70.536,38.1)
  Bottom Layer w0.127: v1(70.536,38.1) 70.282,38.1 70.263,38.081 71.62,38.081 71.652,38.049 72.288,38.049 78.181,43.942 97.739,43.942 C7.4
PA5: C7.33 U1.73 | length 31.8
  Top Layer w0.127: U1.73@69.5,34.159 70.248,34.159 70.3,34.211 70.356,34.211 71.12,34.975 71.12,37.16 v1(71.323,37.363)
  Bottom Layer w0.127: v1(71.323,37.363) 73.838,37.363 79.172,42.697 C7.33
PA6: C7.5 U1.72 | length 33.9
  Top Layer w0.127: U1.72@69.5,33.659 69.5,33.623 70.251,33.623 70.339,33.711 70.356,33.711 70.475,33.83 70.514,33.83 71.882,35.198 v1(71.882,36.246)
  Bottom Layer w0.127: v1(71.882,36.246) 74.041,36.246 79.248,41.453 97.688,41.453 C7.5
PA7: C7.32 U1.71 | length 29.8
  Top Layer w0.127: U1.71@69.5,33.159 70.802,33.159 72.136,34.493 v1(72.288,34.493)
  Bottom Layer w0.127: v1(72.288,34.493) 72.923,34.493 78.588,40.157 C7.32
PB0: C7.20 U1.19 | length 64.9
  Top Layer w0.127: v1(48.641,24.155) 48.641,25.273 49.527,26.159 U1.19@54.3,26.159 ; v1(48.666,19.761) 48.666,17.526 55.785,10.408 95.714,10.408 C7.20
  Bottom Layer w0.127: v1(48.641,24.155) 48.641,20.041 48.793,19.888 v1(48.666,19.761)
PB1: C1.2 C7.17 U1.20 | length 131.1
  Top Layer w0.127: v1(49.708,24.181) 49.911,24.13 49.911,25.293 50.277,25.659 U1.20@54.3,25.659 ; v1@49.936,20.129 v1(49.936,19.787) 49.936,16.795 55.943,10.789 93.629,10.789 93.889,11.049 97.612,11.049 C7.17 101.016,11.709 101.016,40.361 100.025,41.351 89.078,41.351 80.665,32.938 77.287,32.938 76.327,31.979 76.327,29.083 76.81,28.6 C1.2
  Bottom Layer w0.127: v1(49.708,24.181) 49.936,23.952 v1(49.936,19.787)
PB2: C1.5 C7.21 U1.21 | length 89.8
  Top Layer w0.127: v1(50.927,24.105) 50.927,24.841 51.245,25.159 U1.21@54.3,25.159 ; v1@50.978,19.761 50.978,16.292 56.1,11.17 93.471,11.17 94.163,11.862 96.088,11.862 C7.21 ; v1(83.312,25.171) 83.439,25.044 83.439,19.533 v1(83.414,19.507)
  Bottom Layer w0.127: v1(50.927,24.105) 50.927,19.888 v1(51.054,19.761) ; C1.5 81.864,28.6 83.312,27.153 v1(83.312,25.171) ; v1(83.414,19.507) 92.354,19.507 93.599,18.263 93.599,14.046 95.428,12.217 C7.21
PB3: C1.1 C7.16 U1.22 | length 115.5
  Top Layer w0.127: v1@52.045,19.787 52.045,15.764 56.258,11.551 93.313,11.551 95.225,13.462 97.892,13.462 99.136,12.217 100.381,13.462 100.381,38.278 99.873,38.786 95.682,38.786 94.158,40.31 88.575,40.31 80.823,32.557 78.303,32.557 77.927,32.182 C1.1 ; v1(52.045,24.181) 52.045,24.409 52.294,24.659 U1.22@54.3,24.659
  Bottom Layer w0.127: v1(52.045,24.181) 52.121,24.105 v1(52.121,19.787)
PB4: C11.8 U1.23 | length 38
  Top Layer w0.127: C11.8 41.224,50.673 45.212,46.685 45.212,25.527 47.986,22.753 51.963,22.753 53.369,24.159 U1.23@54.3,24.159
PB5: C11.7 U1.24 | length 39.5
  Top Layer w0.127: C11.7 38.557,50.673 44.755,44.475 44.755,25.425 47.808,22.372 52.217,22.372 53.504,23.659 U1.24@54.3,23.659
PB6: C11.6 U1.25 | length 41.1
  Top Layer w0.127: C11.6 36.17,50.673 44.171,42.672 44.171,25.425 47.605,21.991 52.42,21.991 53.588,23.159 U1.25@54.3,23.159
PB7: C11.5 IC2.3 U1.26 | length 51.3
  Top Layer w0.127: IC2.3 31.699,45.39 33.401,47.092 C11.5@33.401,50.444 ; C11.5 C11.5@33.401,50.444 ; 56.109,21.559 47.351,21.559 43.688,25.222 43.688,34.088 43.694,34.094 43.694,41.218 35.687,49.225 34.62,49.225 C11.5@33.401,50.444
PC0: C7.28 U1.53 | length 35
  Top Layer w0.127: U1.53@69.5,24.159 70.202,24.159 71.196,23.165 v1(71.196,22.073)
  Bottom Layer w0.127: v1(71.196,22.073) 71.584,21.685 89.097,21.685 91.999,24.587 91.999,29.54 92.456,29.997 C7.28
PC1: C7.9 U1.54 | length 38.2
  Top Layer w0.127: U1.54@69.5,24.659 70.692,24.659 72.263,23.089 v1(72.263,22.403)
  Bottom Layer w0.127: v1(72.263,22.403) 72.568,22.098 88.971,22.098 91.618,24.745 91.618,29.769 93.142,31.293 97.688,31.293 C7.9
PC2: C7.29 U1.55 | length 36.1
  Top Layer w0.127: U1.55@69.537,25.197 69.5,25.159 71.005,25.159 v1(73.076,23.089)
  Bottom Layer w0.127: v1(73.076,23.089) 73.685,22.479 88.813,22.479 91.237,24.903 91.237,31.471 92.304,32.537 C7.29
PC3: C7.8 U1.56 | length 39.6
  Top Layer w0.127: U1.56@69.5,25.659 71.064,25.659 71.888,24.835 72.346,24.835 v1(72.898,24.282)
  Bottom Layer w0.127: v1(72.898,24.282) 74.32,22.86 88.655,22.86 90.856,25.061 90.856,31.648 93.091,33.884 97.358,33.884 98.704,32.537 C7.8
PC4: C7.30 U1.57 | length 37.3
  Top Layer w0.127: U1.57@69.5,26.159 71.174,26.159 71.78,25.552 v1(72.923,25.552)
  Bottom Layer w0.127: v1(72.923,25.552) 75.235,23.241 88.497,23.241 90.475,25.218 90.475,32.436 93.116,35.077 C7.30
PC5: C7.7 U1.58 | length 41
  Top Layer w0.127: U1.58@69.5,26.659 72.807,26.659 v1(72.847,26.619)
  Bottom Layer w0.127: v1(72.847,26.619) 73.196,26.27 73.221,26.27 73.641,25.85 73.641,25.825 75.844,23.622 88.34,23.622 90.094,25.376 90.094,33.071 93.32,36.297 97.765,36.297 C7.7
PC6: C7.31 U1.59 | length 33.5
  Top Layer w0.127: U1.59@69.5,27.159 72.092,27.159 72.619,27.686 v1(72.923,27.686)
  Bottom Layer w0.127: v1(72.923,27.686) 75.54,27.686 76.175,28.321 76.175,32.126 81.666,37.617 C7.31
PC7: C7.6 U1.60 | length 37.6
  Top Layer w0.127: U1.60@69.5,27.659 71.703,27.659 v1(72.873,28.829)
  Bottom Layer w0.127: v1@72.873,29.108 v1(72.873,28.829) 73.05,28.829 73.787,28.092 75.407,28.092 75.794,28.479 75.794,32.283 81.534,38.024 95.326,38.024 95.997,38.695 97.906,38.695 C7.6
PD7: C7.10 U1.50 | length 39.2
  Top Layer w0.127: v1(67.9,20.472) U1.50@67.9,21.559
  Bottom Layer w0.127: v1(67.9,20.472) 68.213,20.472 68.371,20.314 89.428,20.314 92.735,23.622 99.924,23.622 100.406,24.105 100.406,26.035 C7.10
PE0: C5.1 R13.2 U1.2 | length 60.5
  Top Layer w0.127: R13.2 32.436,23.749 ; U1.2 52.597,34.602 v1(51.943,35.255) 51.283,35.916 51.283,38.837 60.274,47.828 67.031,47.828 68.148,48.946 68.148,50.267 C5.1
  Top Layer w0.203: 32.436,23.749 40.158,23.749 41.072,24.663 v1(41.072,35.23)
  Bottom Layer w0.203: v1(41.072,35.23) 41.097,35.255 v1(51.943,35.255)
PE1: C5.2 R14.2 U1.3 | length 58.3
  Top Layer w0.127: v1@51.13,34.544 50.851,34.823 50.851,39.192 59.995,48.336 63.678,48.336 C5.2 ; v1@51.49,34.108 U1.3@54.274,34.108
  Top Layer w0.203: R14.2 40.437,22.174 42.113,23.851 v1(42.113,34.392)
  Bottom Layer w0.203: v1(42.113,34.392) 42.926,34.392 42.85,34.315 v1(51.333,34.315)
PE3: C5.6 U1.5 | length 20.2
  Top Layer w0.127: v1(52.914,33.377) 53.132,33.159 U1.5@54.3,33.159
  Bottom Layer w0.127: v1(52.914,33.377) v1(52.914,33.377) 53.34,33.376 53.34,47.6 55.829,50.089 C5.6
PE4: C5.3 U1.6 | length 28.1
  Top Layer w0.127: U1.6@54.3,32.659 50.983,32.659 50.419,33.223 50.419,39.37 60.122,49.073 62.179,49.073 63.449,50.343 C5.3
PE5: C5.4 U1.7 | length 27
  Top Layer w0.127: U1.7@54.3,32.159 50.619,32.159 49.987,32.791 49.987,39.853 60.782,50.648 C5.4
PG0: C7.26 U1.51 | length 31.7
  Top Layer w0.127: v1(68.834,21.285) 69.5,21.951 U1.51@69.5,23.159
  Bottom Layer w0.127: v1(68.834,21.285) 69.393,20.726 70.305,20.726 70.501,20.923 89.498,20.923 92.578,24.003 92.614,24.003 92.761,24.15 92.761,24.186 93.492,24.917 C7.26
PG1: C7.11 U1.52 | length 34.7
  Top Layer w0.127: U1.52@69.5,23.659 70.163,23.659 70.479,23.343 70.479,21.915 v1(70.007,21.444)
  Bottom Layer w0.127: v1(70.007,21.444) 70.147,21.304 89.34,21.304 94.096,26.06 97.841,26.06 C7.11
PG2: C7.27 U1.70 | length 40.2
  Top Layer w0.127: U1.70@69.698,32.654 71.389,32.654 v1(72.034,33.299) ; v1(93.955,39.218) 93.955,29.134 95.631,27.457 C7.27
  Bottom Layer w0.127: v1(72.034,33.299) 72.492,33.299 78.41,39.218 v1(93.955,39.218)
PG5: C5.5 U1.1 | length 17.5
  Top Layer w0.127: v1(54.229,36.119) 54.229,35.23 U1.1@54.3,35.159
  Bottom Layer w0.127: v1(54.229,36.119) 54.229,46.939 57.937,50.648 C5.5
PH3: C5.7 U1.15 | length 33.9
  Top Layer w0.127: C5.7 51.613,48.971 48.743,48.971 46.863,47.092 46.863,28.784 47.487,28.159 U1.15@54.3,28.159
PH4: C5.8 U1.16 | length 32.6
  Top Layer w0.127: C5.8 49.733,50.648 46.482,47.396 46.482,28.626 47.449,27.659 U1.16@54.3,27.659
PH5: C11.10 U1.17 | length 31.3
  Top Layer w0.127: C11.10 45.974,50.571 45.974,28.092 46.907,27.159 U1.17@54.3,27.159
PH6: C11.9 U1.18 | length 33.1
  Top Layer w0.127: C11.9 43.332,50.495 45.593,48.235 45.593,27.661 46.594,26.659 U1.18@54.3,26.659
PL0: C7.22 U1.35 | length 40.2
  Top Layer w0.127: U1.35@60.4,21.559 U1.35 60.457,19.29 64.279,15.469 95.733,15.469 C7.22
PL1: C7.15 U1.36 | length 42.2
  Top Layer w0.127: U1.36@60.9,21.559 U1.36 60.957,19.329 64.436,15.85 97.892,15.85 C7.15
PL2: C7.23 U1.37 | length 38.9
  Top Layer w0.127: U1.37@61.4,21.559 U1.37 61.457,19.368 64.594,16.231 88.087,16.231 89.154,17.297 C7.23
PL3: C7.14 U1.38 | length 41.6
  Top Layer w0.127: U1.38@61.9,21.559 U1.38 61.957,19.406 64.752,16.612 87.833,16.612 89.637,18.415 97.866,18.415 C7.14
PL4: C7.24 U1.39 | length 38.3
  Top Layer w0.127: U1.39@62.4,21.559 U1.39 62.457,19.445 64.91,16.993 87.675,16.993 90.52,19.837 C7.24
PL5: C7.13 U1.40 | length 41.1
  Top Layer w0.127: U1.40@62.9,21.559 U1.40 62.957,19.484 65.068,17.374 87.518,17.374 91.251,21.107 97.714,21.107 C7.13
PL6: C7.25 U1.41 | length 37.7
  Top Layer w0.127: U1.41@63.4,21.559 63.457,21.559 U1.41 63.457,19.523 65.226,17.755 87.36,17.755 91.983,22.377 C7.25
PL7: C7.12 U1.42 | length 40.5
  Top Layer w0.127: U1.42@63.9,21.559 U1.42 63.957,19.562 65.383,18.136 87.202,18.136 92.739,23.673 97.688,23.673 C7.12
RD+: R6.1 U2.29 | length 16.3
  Top Layer w0.127: R6.1@16.442,42.588 17.196,41.834 17.196,28.473 18.053,27.616 U2.29
RD-: R5.1 U2.30 | length 14.1
  Top Layer w0.127: R5.1 16.301,39.37 16.789,38.882 16.789,28.067 18.04,26.816 U2.30
RESET: C1.3 C18.3 C20.2 C22.2 D3.1 R11.2 SW1.1 U1.30 | length 151.2
  Top Layer w0.127: 53.01,20.599 53.01,15.338 56.359,11.989 85.039,11.989 v1(85.319,12.268) ; 54.826,20.485 55.002,20.309 57.469,20.309 57.957,20.797 U1.30 ; v1(79.21,19.253) R11.2 77.204,25.337 C1.3 78.232,26.06 79.477,27.305 82.855,27.305 85.954,30.404 SW1.1 86.84,32.1 C22.2
  Top Layer w0.203: v1(31.801,30.328) C20.2 35.916,30.328 37.998,28.245 39.218,28.245 40.005,29.032 40.005,35.916 40.742,36.652 42.139,36.652 43.002,35.789 43.002,24.994 47.346,20.65 54.661,20.65 54.826,20.485
  Bottom Layer w0.127: v1(79.21,19.253) 79.21,18.402 85.319,12.294 v1(85.319,12.268)
  Bottom Layer w0.203: v1(31.801,30.328) 31.801,30.099 30.404,28.702 30.404,14.148 36.246,8.306 C18.3
RESET2: C8.3 D2.1 R4.2 U2.24 | length 23.5
  Top Layer w0.127: v1(19.914,33.426) 20.035,33.305 U2.24 ; v1@20.155,33.185 20.549,33.579 24.13,33.579 24.482,33.93 R4.2 24.596,35.019 D2.1@26.055,35.019
  Bottom Layer w0.127: v1(19.914,33.426) 19.914,42.748 19.329,43.332 19.329,46.609 C8.3
RXD1: C17.3 U1.45 | length 50.8
  Top Layer w0.127: U1.45 65.457,19.678 65.857,19.279 71.608,19.279 74.244,21.915 74.244,47.366 75.596,48.717 84.353,48.717 C17.3
RXD2: C17.5 U1.12 | length 46.5
  Top Layer w0.127: U1.12@54.3,29.659 66.357,29.659 66.726,30.028 66.726,34.041 68.612,35.927 68.612,48.19 72.644,52.222 79.197,52.222 80.747,50.673 C17.5
RXD3: C17.7 U1.63 | length 24.9
  Top Layer w0.127: U1.63@69.5,29.159 70.144,29.159 73.482,32.497 73.482,48.387 75.768,50.673 C17.7
RXL: LED3.2 U2.10 | length 3
  Top Layer w0.127: U2.10 29.762,26.016 LED3.2
SCK2: C8.2 U2.15 | length 26
  Top Layer w0.127: C8.2 23.8,47.727 24.028,47.955 24.028,48.816 24.438,49.225 26.616,49.225 28.829,47.012 28.829,31.318 27.527,30.016 U2.15
SCL: C11.1 C17.1 R2.2 U1.43 | length 137.1
  Top Layer w0.127: U1.43@64.4,21.559 U1.43 64.457,19.6 65.541,18.517 71.924,18.517 75.006,21.599 75.006,46.38 76.53,47.904 91.16,47.904 91.44,48.184 91.44,50.622 C17.1 ; v1(91.389,46.558) 92.265,45.682 R2.2
  Bottom Layer w0.127: v1(91.389,46.558) C17.1
  Bottom Layer w0.203: C11.1 25.044,52.705 89.357,52.705 C17.1
SDA: C11.2 C17.2 R3.2 U1.44 | length 127
  Top Layer w0.127: U1.44@64.9,21.559 U1.44 64.957,19.639 65.699,18.898 71.766,18.898 74.625,21.757 74.625,47.193 75.768,48.336 86.081,48.336 88.417,50.673 C17.2 C17.2@88.773,50.597 ; R3.2 88.658,46.418 v1(88.824,46.584)
  Bottom Layer w0.127: v1@88.824,46.66 88.824,50.647 C17.2
  Bottom Layer w0.203: C11.2 25.552,51.257 26.34,52.045 87.478,52.045 C17.2
TXD1: C17.4 U1.46 | length 47.5
  Top Layer w0.127: U1.46@65.9,21.559 65.9,19.774 66.015,19.66 71.45,19.66 73.863,22.073 73.863,47.523 75.461,49.121 82.217,49.121 C17.4
TXD2: C17.6 U1.13 | length 43.8
  Top Layer w0.127: U1.13@54.3,29.159 66.396,29.159 67.107,29.87 67.107,33.884 68.993,35.77 68.993,48.032 72.802,51.841 77.521,51.841 C17.6
TXD3: C17.8 U1.64 | length 23.1
  Top Layer w0.127: U1.64@69.5,29.659 70.105,29.659 73.101,32.655 73.101,50.165 C17.8
TXL: LED4.2 U2.11 | length 3.6
  Top Layer w0.127: U2.11 28.112,26.816 29.82,28.524 LED4.2
UGND: C14.2 L1.2 R10.2 U2.28 X1.4 | length 52.5
  Top Layer w0.127: 17.818,38.697 17.577,38.456 17.577,28.727 17.888,28.416 U2.28 ; C14.2 21.304,36.678 R10.2
  Top Layer w0.254: X1.4@7.562,47.066 7.562,47.415 L1.2 11.293,51.145 13.305,51.145 17.818,46.632 17.818,38.697 C14.2
  Bottom Layer w0.254: X1.4@7.562,35.026 7.562,39.827 ; X1.4@7.562,47.066 7.562,39.827 ; X1.4@10.272,39.796 7.593,39.796 7.562,39.827
USBVCC: C13.2 F1.2 T1.3 U2.31 | length 19.8
  Top Layer w0.203: T1.3 8.935,29.535 10.185,30.785 11.989,30.785 16.757,26.016 U2.31
  Top Layer w0.254: F1.2 8.831,28.75 T1.3
VIN: C3.1 C4.2 C18.8 D1.K IC1.3 R12.1 | length 92.2
  Top Layer w0.203: R12.1 32.537,33.553 v1(32.588,33.604)
  Top Layer w0.254: IC1.3 8.614,14.627 9.415,13.826 C4.2 12.057,13.826 15.291,10.592 15.291,8.052 16.713,6.629 C3.1 21.641,6.629 D1.K 27.203,1.067 48.285,1.067 48.946,1.727 C18.8
  Bottom Layer w0.203: v1(32.588,33.604) 33.014,33.179 33.014,29.825 31.369,28.181 31.369,15.316 40.97,5.715 46.431,5.715 48.616,3.531 48.616,3.126 48.618,3.124 C18.8
VUCAP: C14.1 U2.27 | length 7.3
  Top Layer w0.127: U2.27 19.64,29.216 19.71,29.286 19.71,31.166 19.025,31.852 19.025,34.095 C14.1
XTAL1: C23.2 R18.1 U1.34 X3.2 | length 9.6
  Top Layer w0.127: R18.1 59.114,13.183 C23.2 60.884,16.769 X3.2 60.407,18.359 59.9,18.866 U1.34@59.9,21.559
XTAL2: C28.2 R18.2 U1.33 X3.1 | length 9.2
  Top Layer w0.127: R18.2 59.06,14.978 C28.2 57.302,16.642 X3.1 59.4,18.74 U1.33@59.4,21.559
XVCC: F1.1 X1.1 | length 16.6
  Top Layer w0.254: F1.1 2.134,35.433 4.394,37.694 11.481,37.694 12.272,38.485 X1.1
pads on no net: C18.1 IC3.4 U1.4 U1.8 U1.9 U1.14 U1.27 U1.28 U1.29 U1.47 U1.48 U1.49 U1.65 U1.66 U1.67 U1.68 U1.69 U1.79 U2.5 U2.6 U2.7 U2.12 U2.14 U2.22 U2.23 U2.25 U2.26

## Keep-outs
Keep-Out Layer:
  lines w0.1: 101.6,2.667 101.6,0 ; 101.6,0 101.6,53.34 0,53.34 0,0 101.6,0

## Silkscreen, mask and mechanical layers (free items; w line width, h text height)
Top Overlay:
  lines w0.1: 32.283,46.228 64.338,46.228 ; 32.69,9.55 49.606,9.55 49.632,9.525 ; 51.359,7.874 93.675,7.874 ; 64.668,42.901 92.456,42.901 ; 93.04,8.407 93.066,8.433 93.066,48.692
  text "5V" at 93.142,49.936 h1.52
  text "7" at 51.365,48.481 h1.52 r90
  text "9" at 44.044,48.471 h1.52 r90
  text "8" at 46.406,48.469 h1.52 r90
  text "6" at 53.854,48.467 h1.52 r90
  text "5" at 56.445,48.465 h1.52 r90
  text "3" at 61.551,48.474 h1.52 r90
  text "2" at 64.065,48.464 h1.52 r90
  text "4" at 58.909,48.436 h1.52 r90
  text "11" at 38.811,47.994 h1.52 r90
  text "13" at 33.706,47.805 h1.52 r90
  text "12" at 36.17,47.815 h1.52 r90
  text "10" at 41.326,47.808 h1.52 r90
  text "22" at 93.335,47.473 h1.52
  text "PWM" at 60.909,46.482 h1.52
  text "GND" at 31.115,46.228 h1.52 r90
  text "AREF" at 28.626,45.537 h1.52 r90
  text "TXD  1" at 66.523,45.152 h1.52 r90
  text "RXD  0" at 69.164,44.89 h1.52 r90
  text "24" at 93.329,44.526 h1.52
  text "RXD  21" at 91.948,44.251 h1.52 r90
  text "TXD  14" at 74.168,44.066 h1.52 r90
  text "TXD  16" at 79.273,44.062 h1.52 r90
  text "RXD  17" at 81.991,44.062 h1.52 r90
  text "TXD  18" at 84.328,44.06 h1.52 r90
  text "RXD  19" at 86.792,44.06 h1.52 r90
  text "TXD  20" at 89.433,44.064 h1.52 r90
  text "RXD  15" at 76.81,44.055 h1.52 r90
  text "COMUNICATION" at 64.567,43.078 h1.52
  text "26" at 93.325,42.037 h1.52
  text "28" at 93.324,39.395 h1.52
  text "30" at 93.348,36.779 h1.52
  text "32" at 93.355,34.315 h1.52
  text "34" at 93.349,31.648 h1.52
  text "36" at 93.345,29.286 h1.52
  text "38" at 93.343,26.67 h1.52
  text "40" at 93.305,24.232 h1.52
  text "42" at 93.312,21.59 h1.52
  text "44" at 93.307,19.126 h1.52
  text "46" at 93.303,16.485 h1.52
  text "48" at 93.301,14.097 h1.52
  text "ARDUINO MEGA 2560" at 66.37,13.157 h2.5
  text "50" at 93.346,11.405 h1.52
  text "52" at 93.353,8.89 h1.52
  text "POWER" at 44.729,8.23 h1.52
  text "DIGITAL" at 92.634,8.23 h1.52 r90
  text "ANALOG IN" at 51.613,6.731 h1.52
  text "A0" at 53.569,4.834 h1.52 r90
  text "A1" at 56.134,4.834 h1.52 r90
  text "A2" at 58.877,4.834 h1.52 r90
  text "A3" at 61.316,4.834 h1.52 r90
  text "A4" at 63.83,4.834 h1.52 r90
  text "A5" at 66.396,4.834 h1.52 r90
  text "A6" at 68.707,4.834 h1.52 r90
  text "A7" at 71.476,4.834 h1.52 r90
  text "A8" at 75.921,4.834 h1.52 r90
  text "A9" at 78.435,4.834 h1.52 r90
  text "A10" at 81.026,4.834 h1.52 r90
  text "A11" at 83.591,4.834 h1.52 r90
  text "A12" at 86.03,4.834 h1.52 r90
  text "A13" at 88.595,4.834 h1.52 r90
  text "A14" at 90.932,4.834 h1.52 r90
  text "A15" at 93.523,4.834 h1.52 r90
  text "5V" at 33.884,4.707 h1.52 r90
  text "RESET" at 36.627,4.707 h1.52 r90
  text "+3.3V" at 39.218,4.707 h1.52 r90
  text "5V" at 41.783,4.707 h1.52 r90
  text "GND" at 44.196,4.707 h1.52 r90
  text "GND" at 46.66,4.707 h1.52 r90
  text "VIN" at 49.276,4.709 h1.52 r90

## Text inside footprints (layer, text, board x,y; h text height)
C2: Top Overlay "+" at 26.837,6.986 h0.89 r90
C3: Top Overlay "+" at 17.845,6.96 h0.89 r90